# Altium PCB OpenMoteSTM-Border.PcbDoc (part 1 of 2)
Units mil, origin at the board's own origin, x right, y up, seen from the top; angles counter-clockwise.
Board outline 3923 x 2926 mil, 2 copper layers (Top Layer, Bottom Layer); 88 components, 131 nets, 421 pads, 102 vias.
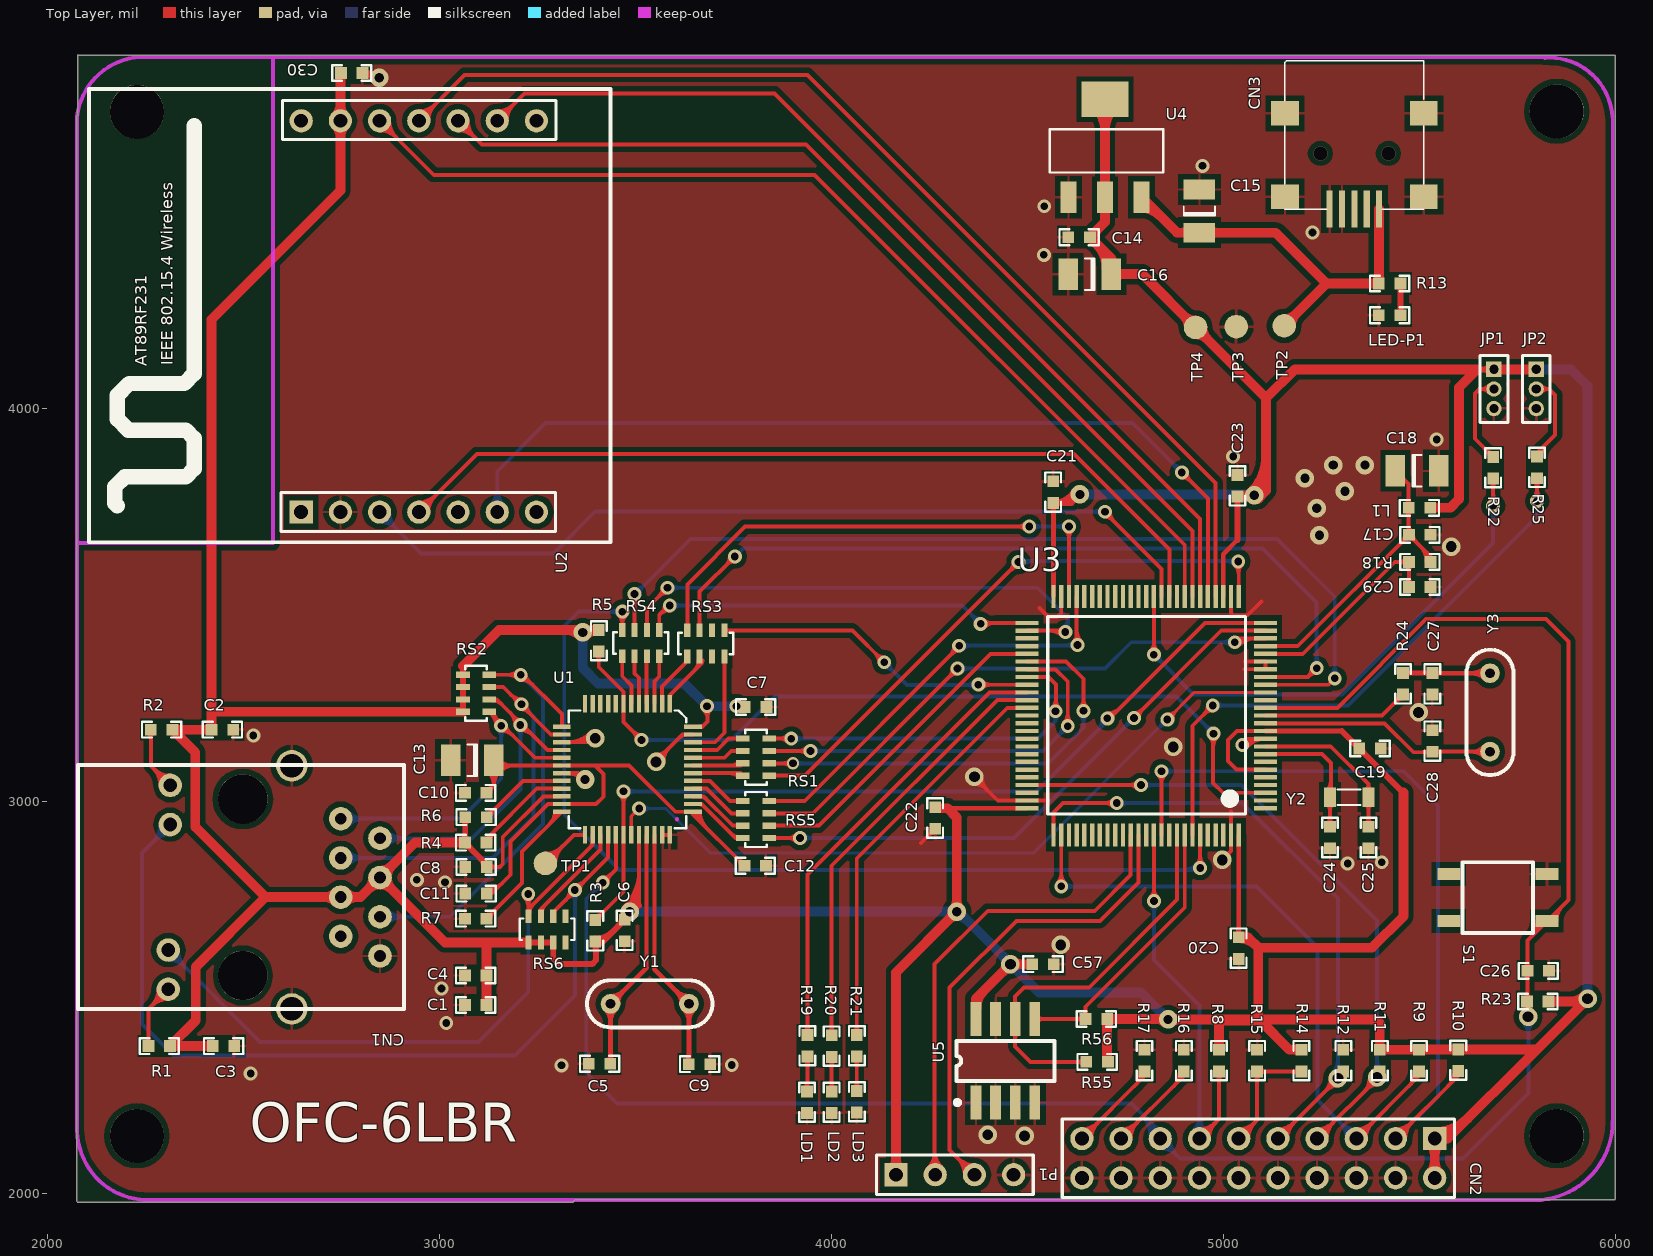
[diagram p0: Top Layer view]
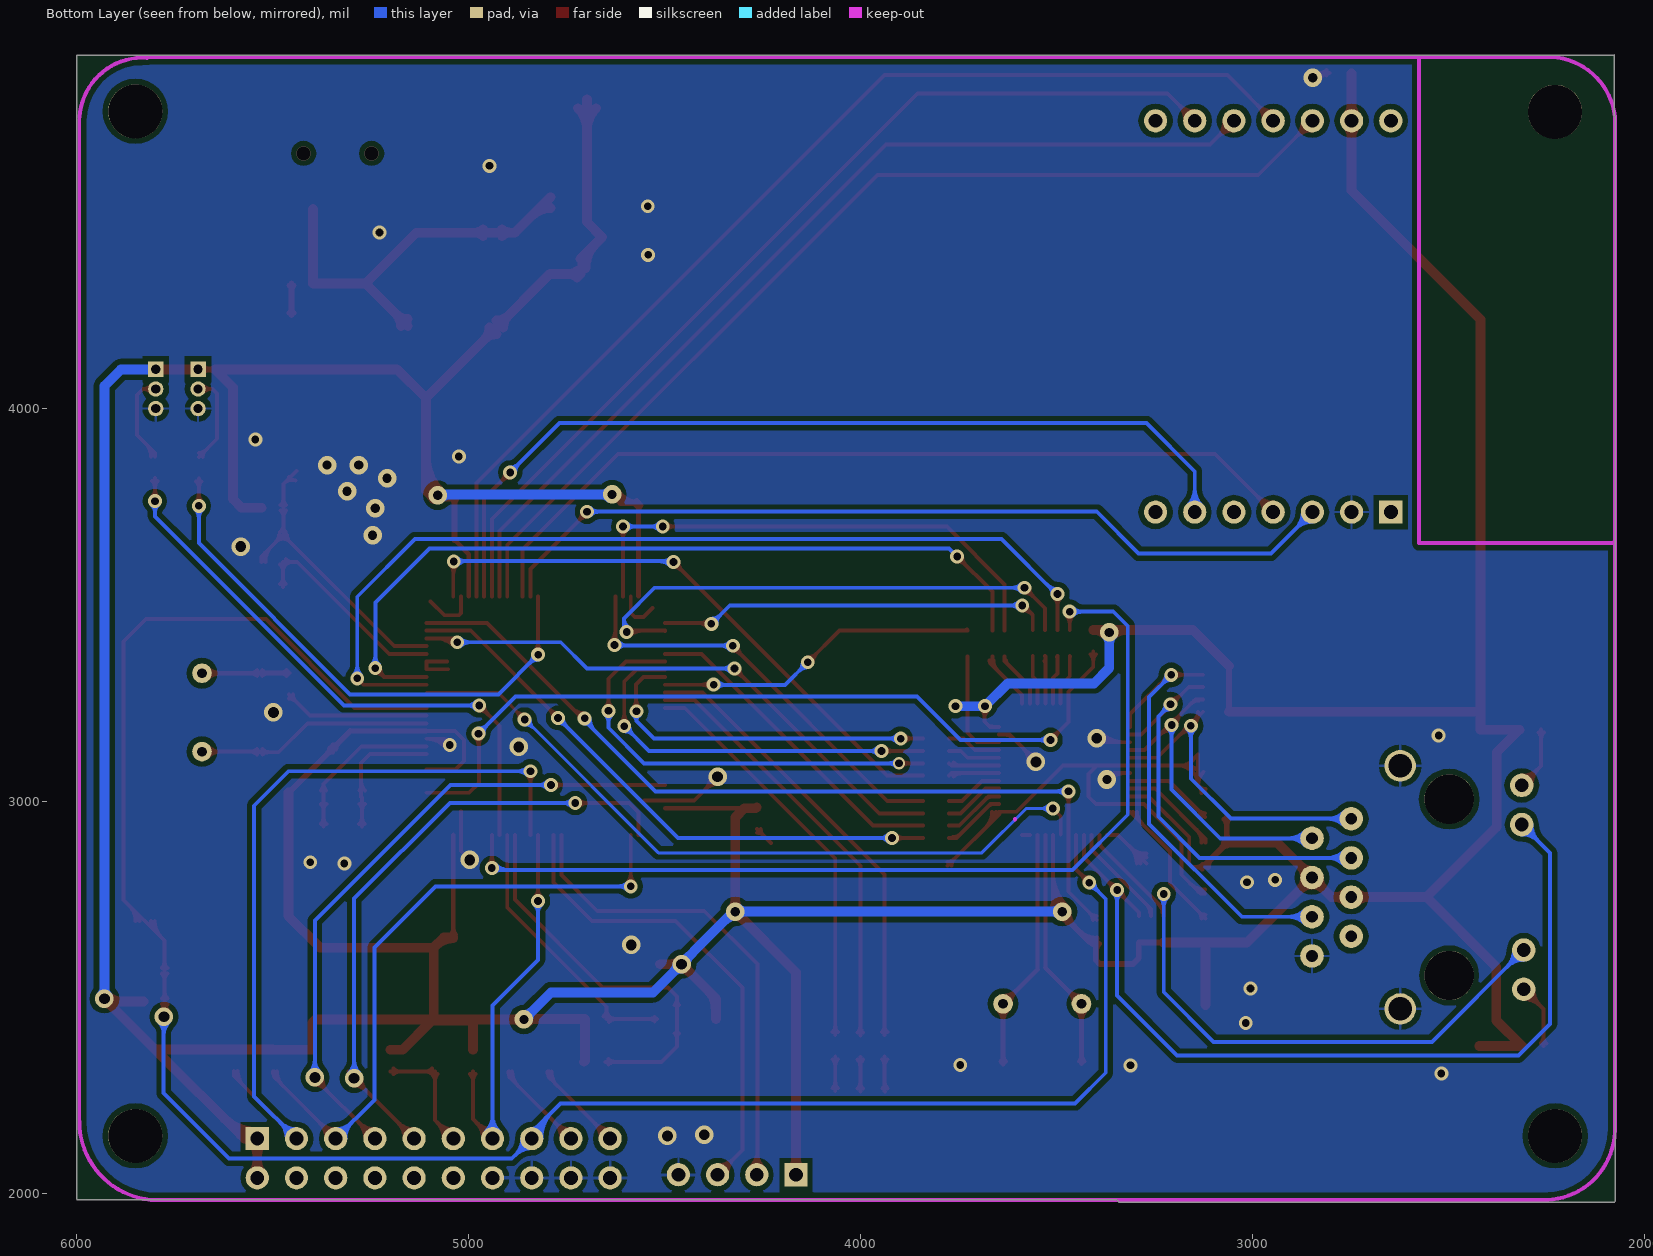
[diagram p1: Bottom Layer view, seen from below]

## Layer stack, top to bottom
Top Layer: signal copper 1.4
Dielectric: dielectric 12.6, FR-4, Dk 4.8
Bottom Layer: signal copper 1.4

## Board outline
2075,4746 2075,1979 2077,1977 3340,1977 3346,1983 5997,1983 5998,1984 5998,4902 2078,4902 2077,4903 2077,4748 2075,4746

## Design rules (kind name [scope] priority, off if disabled: settings)
Clearance 3V3 [InNamedPolygon ('3V3')] p1: gap=19.68
Clearance OtherPoly [InPolygon] p2: gap=13.78
Clearance [All] p3 off: gap=13.78
MinimumSolderMaskSliver [All] p1: minsoldermaskwidth=0
PlaneConnect [All] p1: planeconnectstyle=Relief reliefexpansion=20 reliefentries=4 reliefconductorwidth=5 reliefairgap=19.68
PolygonConnect GND [IsVia] p1: connectstyle=Direct reliefconductorwidth=10 reliefentries=4 polygonreliefangle="90 Angle"
PolygonConnect [All] p2: connectstyle=Relief reliefconductorwidth=7 reliefentries=4 polygonreliefangle="90 Angle"
RoutingVias [All] p1: holewidth=10 width=18 viastyle="Through Hole" minholewidth=2 minwidth=5 maxholewidth=28 maxwidth=50
SilkToSilkClearance [All] p1: silktosilkclearance=1
SilkscreenOverComponentPads [All] p1: minsilkscreentomaskgap=0
SolderMaskExpansion [All] p1: expansion=4
TestPointUsage [All] p1: valid=0 allowmultiple=FALSE
Testpoint [All] p1: side=15 testpointundercomponent=TRUE minsize=40 maxsize=100 preferedsize=60 minholesize=0 maxholesize=40 preferedholesize=32 testpointgrid=1 style=1021 order=0123456789
Width [All] p1: maxlimit=30 minlimit=5 preferedwidth=10
20 further rules are at their usual default settings.

## Classes and differential pairs
component class MCU: C17 C18 C19 C20 C21 C22 C23 C24 C25 C26 C27 C28 C29 C30 C57 JP1 JP2 L1 LD1 LD2 LD3 P1 P2 R18 R19 R20 R21 R22 R23 R24 R25 R55 R56 S1 U2 U3 U5 Y2 Y3
component class JTAG: C14 C15 C16 CN2 CN3 LED-P1 R8 R9 R10 R11 R12 R13 R14 R15 R16 R17 SB1 SB2 SB3 TP2 TP3 TP4 U4
component class DP83848CVV: C1 C2 C3 C4 C5 C6 C7 C8 C9 C10 C11 C12 C13 CN1 R1 R2 R3 R4 R5 R6 R7 RS1 RS2 RS3 RS4 RS5 RS6 TP1 U1 Y1

## Components (designator, comment, footprint, x,y, rotation, side; value= is the part's Value field where it differs from the comment)
C1 "Cap" 0603 3067,2480 r0 top
C2 "Cap" 0603 2471,3182 r180 top
C3 "Cap" 0603 2474,2375 r180 top
C4 "Cap" 0603 3067,2555 r0 top
C5 "Cap" 0603 3383,2330 r0 top
C6 "Cap" 0603 3472,2645 r90 top
C7 "Cap" 0603 3831,3240 r180 top
C8 "Cap" 0603 3068,2832 r0 top
C9 "Cap" 0603 3688,2329 r180 top
C10 "Cap" 0603 3067,3021 r0 top
C11 "Cap" 0603 3068,2764 r0 top
C12 "Cap" 0603 3830,2835 r180 top
C13 "Cap Pol1" 1210 3138,3106 r180 top
C14 "Cap" 0603 4606,4438 r0 top
C15 "Cap Pol1" 1210 4940,4450 r90 top
C16 "Cap Pol1" 1210 4713,4346 r180 top
C17 "Cap" 0603 5475,3679 r0 top
C18 "Cap Pol1" 1210 5438,3840 r0 top
C19 "Cap" 0603 5348,3134 r0 top
C20 "Cap" 0603 5038,2650 r270 top
C21 "Cap" 0603 4565,3763 r90 top
C22 "Cap" 0603 4264,2981.78 r270 top
C23 "Cap" 0603 5035,3779 r90 top
C24 "Cap" 0603 5271,2882 r90 top
C25 "Cap" 0603 5369,2932 r270 top
C26 "Cap" 0603 5827,2567 r180 top
C27 "Cap" 0603 5532,3324 r270 top
C28 "Cap" 0603 5532,3128 r90 top
C29 "Cap" 0603 5475,3546 r0 top
C30 "Cap" 0603 2801,4857 r180 top
C57 "Cap" 0603 4564,2584 r180 top
CN1 "J0011D21B" RJ45 2750,2955 r90 top
CN2 "JTAG" HDR2X10 5538,2139 r180 top
CN3 "USB" MINI-USB 5328,4658 r180 top
JP1 "MHDR1X3" MHDR1X3 5689,4101 r270 top
JP2 "MHDR1X3" MHDR1X3 5797,4101 r270 top
L1 "Res2" 0603 5524,3748 r180 top
LD1 "GREEN" 0603 3937,2257 r270 top
LD2 "ORANGE" 0603 4000,2257 r270 top
LD3 "RED" 0603 4064,2258 r270 top
LED-P1 "RED" 0603 5448,4239 r180 top
P1 "Header 4" HDR1X4 4164,2047 r0 top
R1 "Res2" 0603 2260,2375 r0 top
R2 "Res2" 0603 2266,3182 r0 top
R3 "Res2" 0603 3397,2644 r90 top
R4 "Res2" 0603 3117,2894 r180 top
R5 "Res2" 0603 3406,3434 r270 top
R6 "Res2" 0603 3118,2959 r180 top
R7 "Res2" 0603 3067,2700 r0 top
R8 "Res2" 0603 4988,2313 r90 top
R9 "Res2" 0603 5498,2313 r90 top
R10 "Res2" 0603 5598,2314 r90 top
R11 "Res2" 0603 5398,2313 r90 top
R12 "Res2" 0603 5305,2363 r270 top
R13 "Res2" 0603 5448,4320 r180 top
R14 "Res2" 0603 5198,2313 r90 top
R15 "Res2" 0603 5085,2363 r270 top
R16 "Res2" 0603 4898,2313 r90 top
R17 "Res2" 0603 4798,2313 r90 top
R18 "Res2" 0603 5525,3610 r180 top
R19 "Res2" 0603 3938,2401 r270 top
R20 "Res2" 0603 4000,2400 r270 top
R21 "Res2" 0603 4064,2401 r270 top
R22 "Res2" 0603 5687,3825 r90 top
R23 "Res2" 0603 5776,2489 r0 top
R24 "Res2" 0603 5457,3274 r90 top
R25 "Res2" 0603 5799,3876 r270 top
R55 "Res2" 0603 4702,2335 r180 top
R56 "Res2" 0603 4700,2444 r180 top
RS1 "51R" RES-4B 3777,3157 r0 top
RS2 "51R" RES-4B 3063,3320 r0 top
RS3 "51R" RES-4B 3724,3432 r270 top
RS4 "51R" RES-4B 3558,3433 r270 top
RS5 "51R" RES-4B 3777,2998 r0 top
RS6 "2K2" RES-4B 3319,2703 r270 top
S1 "SW-PB" KEY-SMD 5823,2698 r180 top
TP1 "25MHz" TP 3270,2841 r0 top
TP2 "5V" TP 5154,4212 r180 top
TP3 "GND" TP 5032,4210 r180 top
TP4 "3V3" TP 4928,4208 r180 top
U1 "DP83848CVV" DP83848CVV 3474,3086 r270 top
U2 "AT86RF231" AT86RF231 2891,4218 r90 top
U3 "STM32F107V" STM32F107 5017,3007 r180 top
U4 "LD1117S25TR" LD1117 4697,4790 r90 top
U5 "AT24C258" AT24C256C 4322,2231 r90 top
Y1 "25MHz" XTAL 3437,2483 r0 top
Y2 "32.768K" 32.768K 5272,3011 r0 top
Y3 "25MHz" XTAL 5679,3127 r90 top

## Footprints (in the part's own frame and the unit in brackets; to place one, negate y for a bottom-side part, rotate by r counter-clockwise, add the part's x,y. Pads: shape width x height; smd on the part's side, far side on the other; paste and mask are expansions set on the pad)
32.768K [mil]
  rect 30x50 smd: 1(-1.43,-1) 2(97,-1)
  silkscreen extent 18,-21 77,19
0603 [mil]
  rect 30x30 smd: 1(-2.5,0) 2(52.5,0)
  silkscreen extent -25,-20 75,20
1210 [mil]
  rect 50x80 smd: 1(-0.41,2.13) 2(109.83,2.13)
  silkscreen extent 43,-38 67,42
AT24C256C [mm]
  rect 2.2x0.7 smd: 1(0,-1.168) 2(0,-2.438) 3(0,-3.708) 4(0,-4.978) 5(5.4,-4.978) 6(5.4,-3.708) 7(5.4,-2.438) 8(5.4,-1.168)
  silkscreen extent -0.15,-6.25 4,0.18
AT86RF231 [mm]
  rect 1.5x1.5 hole 0.9: 1(-12.217,6.198)
  round 1.5 hole 0.9: 2(-12.217,3.658) 3(-12.217,1.118) 4(-12.217,-1.422) 5(-12.217,-3.962) 6(-12.217,-6.502) 7(-12.217,-9.042) 8(13.132,-9.042) 9(13.132,-6.502) 10(13.132,-3.962) 11(13.132,-1.422) 12(13.132,1.118) 13(13.132,3.658) 14(13.132,6.198)
  silkscreen extent -14.17,-13.84 15.19,19.94
DP83848CVV [mil] "TSQFP, 48-Leads, Body 10.2x10.2mm (max), Pitch 0.50mm, IPC Medium Density"
  rect 45x11 smd: 1(-162.32,113.27) 2(-162.32,93.58) 3(-162.32,73.9) 4(-162.32,54.21) 5(-162.32,34.53) 6(-162.32,14.84) 7(-162.32,-4.84) 8(-162.32,-24.53) 9(-162.32,-44.21) 10(-162.32,-63.9) 11(-162.32,-83.58) 12(-162.32,-103.27) 25(172.32,-103.27) 26(172.32,-83.58) 27(172.32,-63.9) 28(172.32,-44.21) 29(172.32,-24.53) 30(172.32,-4.84) 31(172.32,14.84) 32(172.32,34.53) 33(172.32,54.21) 34(172.32,73.9) 35(172.32,93.58) 36(172.32,113.27)
  rect 11x45 smd: 13(-103.27,-162.32) 14(-83.58,-162.32) 15(-63.9,-162.32) 16(-44.21,-162.32) 17(-24.53,-162.32) 18(-4.84,-162.32) 19(14.84,-162.32) 20(34.53,-162.32) 21(54.21,-162.32) 22(73.9,-162.32) 23(93.58,-162.32) 24(113.27,-162.32) 37(113.27,172.32) 38(93.58,172.32) 39(73.9,172.32) 40(54.21,172.32) 41(34.53,172.32) 42(14.84,172.32) 43(-4.84,172.32) 44(-24.53,172.32) 45(-44.21,172.32) 46(-63.9,172.32) 47(-83.58,172.32) 48(-103.27,172.32)
  silkscreen extent -145,-145 155,155
HDR1X4 [mm] "Connector; Header; 4 Position"
  rect 1.5x1.5 hole 0.9: 1(0,0)
  round 1.5 hole 0.9: 2(2.54,0) 3(5.08,0) 4(7.62,0)
  silkscreen extent -1.27,-1.27 8.89,1.27
HDR2X10 [mm] "Connector; Header; 10x2 Position"
  rect 1.5x1.5 hole 0.9: 1(0,0)
  round 1.5 hole 0.9: 2(0,2.54) 3(2.54,0) 4(2.54,2.54) 5(5.08,0) 6(5.08,2.54) 7(7.62,0) 8(7.62,2.54) 9(10.16,0) 10(10.16,2.54) 11(12.7,0) 12(12.7,2.54) 13(15.24,0) 14(15.24,2.54) 15(17.78,0) 16(17.78,2.54) 17(20.32,0) 18(20.32,2.54) 19(22.86,0) 20(22.86,2.54)
  silkscreen extent -1.27,-1.27 24.13,3.81
KEY-SMD [mil]
  rect 59.06x31.5 smd: 1(-1,4) 1(249,4) 2(-1,-116) 2(249,-116)
  silkscreen extent 34,-146 214,34
LD1117 [mil] "SOT223, 4-Leads, Body 6.7x8.3mm (max), Pitch 2.30mm, IPC Medium Density"
  rect 80x40 smd: 1(-250,93) 2(-250,0) 3(-250,-93)
  rect 90x120 smd: 2(0,0)
  silkscreen extent -187,-149 -77,141
MHDR1X3 [mm] "Connector; Header; 3 Position"
  rect 1x1 hole 0.6: 1(0,0)
  round 1 hole 0.6: 2(1.27,0) 3(2.54,0)
  silkscreen extent -0.9,-0.9 3.44,0.9
MINI-USB [mm]
  rect 0.4x2.4 smd: 1(-1.727,3.76) 2(-0.927,3.76) 3(-0.127,3.76) 4(0.673,3.76) 5(1.473,3.76)
  rect 1.8x1.6 smd: 6(4.373,2.96) 7(4.373,-2.44) 8(-4.627,-2.44) 9(-4.627,2.96)
  silkscreen extent -4.63,-5.84 4.37,3.76
RES-4B [mil]
  rect 35x15.75 smd: 1(-3.5,2.24) 2(63.5,2.24) 3(-3.5,-29.25) 4(63.5,-29.25) 5(-3.5,-60.75) 6(63.5,-60.75) 7(-3.5,-92.24) 8(63.5,-92.24)
  silkscreen extent 2,-115 58,25
RJ45 [mil]
  round 126 hole 126 unplated: 0(-400,252) 0(50,252)
  round 60 hole 30: 1(0,2) 2(-50,-98) 3(-100,2) 4(-150,-98) 5(-200,2) 6(-250,-98) 7(-300,2) 8(-350,-98)
  round 60 hole 35: 9(85,437) 10(-15,437) 11(-335,442) 12(-435,442)
  round 80 hole 60: 13(-485,127) 14(135,127)
  silkscreen extent -485,-159 137,672
STM32F107 [mil] "TSQFP, 100-Leads, Body 17.0x17.0mm (max), Pitch 0.50mm, IPC Medium Density"
  rect 59.06x11 smd: 1(-89.13,25.22) 2(-89.13,5.54) 3(-89.13,-14.15) 4(-89.13,-33.83) 5(-89.13,-53.52) 6(-89.13,-73.2) 7(-89.13,-92.89) 8(-89.13,-112.57) 9(-89.13,-132.26) 10(-89.13,-151.94) 11(-89.13,-171.63) 12(-89.13,-191.31) 13(-89.13,-211) 14(-89.13,-230.68) 15(-89.13,-250.37) 16(-89.13,-270.06) 17(-89.13,-289.74) 18(-89.13,-309.43) 19(-89.13,-329.11) 20(-89.13,-348.8) 21(-89.13,-368.48) 22(-89.13,-388.17) 23(-89.13,-407.85) 24(-89.13,-427.54) 25(-89.13,-447.22) 51(519.13,-447.22) 52(519.13,-427.54) 53(519.13,-407.85) 54(519.13,-388.17) 55(519.13,-368.48) 56(519.13,-348.8) 57(519.13,-329.11) 58(519.13,-309.43) 59(519.13,-289.74) 60(519.13,-270.06) 61(519.13,-250.37) 62(519.13,-230.68) 63(519.13,-211) 64(519.13,-191.31) 65(519.13,-171.63) 66(519.13,-151.94) 67(519.13,-132.26) 68(519.13,-112.57) 69(519.13,-92.89) 70(519.13,-73.2) 71(519.13,-53.52) 72(519.13,-33.83) 73(519.13,-14.15) 74(519.13,5.54) 75(519.13,25.22)
  rect 11x59.06 smd: 26(-21.22,-515.13) 27(-1.54,-515.13) 28(18.15,-515.13) 29(37.83,-515.13) 30(57.52,-515.13) 31(77.2,-515.13) 32(96.89,-515.13) 33(116.57,-515.13) 34(136.26,-515.13) 35(155.94,-515.13) 36(175.63,-515.13) 37(195.31,-515.13) 38(215,-515.13) 39(234.69,-515.13) 40(254.37,-515.13) 41(274.06,-515.13) 42(293.74,-515.13) 43(313.43,-515.13) 44(333.11,-515.13) 45(352.8,-515.13) 46(372.48,-515.13) 47(392.17,-515.13) 48(411.85,-515.13) 49(431.54,-515.13) 50(451.22,-515.13) 76(451.22,93.13) 77(431.54,93.13) 78(411.85,93.13) 79(392.17,93.13) 80(372.48,93.13) 81(352.8,93.13) 82(333.11,93.13) 83(313.43,93.13) 84(293.74,93.13) 85(274.06,93.13) 86(254.37,93.13) 87(234.69,93.13) 88(215,93.13) 89(195.31,93.13) 90(175.63,93.13) 91(155.94,93.13) 92(136.26,93.13) 93(116.57,93.13) 94(96.89,93.13) 95(77.2,93.13) 96(57.52,93.13) 97(37.83,93.13) 98(18.15,93.13) 99(-1.54,93.13) 100(-21.22,93.13)
  silkscreen extent -38,-464 466,40
TP [mil]
  round 60 smd: 1(0,0)
XTAL [mil]
  round 50 hole 25: 1(-1,0) 2(199,0)
  silkscreen extent -61,-60 259,60

## Part data
C1 C2 C3 C4 C5 C6 C7 C8 C9 C10 C11 C12 C14 C17 C19 C20 C21 C22 C23 C24 C25 C26 C27 C28 C29 C30 C57: "Capacitor"
C13 C15 C16 C18: "Polarized Capacitor (Radial)"
CN2: library part "Header 10X2", "Header, 10-Pin, Dual row"
CN3: library part MINIUSB_A
JP1 JP2: "Header, 3-Pin"
L1 R1 R2 R3 R4 R5 R6 R7 R8 R9 R10 R11 R12 R13 R14 R15 R16 R17 R18 R19 R20 R21 R22 R23 R24 R25 R55 R56: "Resistor"
LD1 LD2 LD3 LED-P1: library part LED2, "Typical RED, GREEN, YELLOW, AMBER GaAs LED"
P1: "Header, 4-Pin"
RS1 RS2 RS3 RS4 RS5 RS6: library part "Resister Array"
S1: "Switch"
TP1 TP2 TP3 TP4: library part TP
U4: library part LD1117
Y1 Y2 Y3: library part XTAL, "Crystal Oscillator"

## Free pads (board coordinates)
  round 137.8 hole 137.8 unplated: 0(2228,2146) 0(2228,4758) 0(5849,2146) 0(5849,4759)

## Via types
v1: diameter 35.43, hole 19.68, Top Layer to Bottom Layer, 70 vias
v2: diameter 47.24, hole 27.56, Top Layer to Bottom Layer, 15 vias
v3: diameter 47.24, hole 23.62, Top Layer to Bottom Layer, 14 vias
v4: diameter 35.43, hole 35.43, Top Layer to Bottom Layer, 2 vias
v5: diameter 31.5, hole 19.68, Top Layer to Bottom Layer, 1 vias

## Nets (pads, with @x,y where several pads share a name; then routed paths per layer and width w, separated by ;. In a path a pad name is that pad's centre, name@x,y a point inside that pad or via, vN(x,y) a via of type N, cw(c..) or ccw(c..) an arc to the next point about the centre after c; other vN are vias at no path point)
3V3: C1.2 C2.2 C3.2 C4.2 C6.2 C7.2 C8.2 C14.2 C16.1 C19.1 C20.1 C21.1 C22.1 C23.1 C30.2 C57.2 CN1.4 CN1.5 CN2.1 CN2.2 JP1.1 JP2.1 L1.1 P1.1 R1.2 R2.2 R3.1 R4.2 R5.1 R6.2 R8.2 R9.2 R10.2 R11.2 R14.2 R23.2 R55.1 R56.1 RS2.1 RS2.3 RS2.5 RS2.7 RS6.4 RS6.6 RS6.8 TP4.1 U1.22 U1.32 U1.48 U2.13 U3.6 U3.11 U3.28 U3.50 U3.75 U3.100 U4.2 U5.8 | length 22802.7
  Top Layer w10: C8.2@3120.5,2832 3154,2832 3161,2839 3161,2908 3265.1,3012.1 U1.22@3311.68,3012.1 U1.22@3292.1,3012.1 ; C8.2@3127.57,2824.93 cw(c3144.64,2807.86) 3144.64,2832 cw(c3144.64,2856.14) C8.2@3127.57,2839.07 ; v3@3471.83,2731.17 ccw(c3383.24,2819.76) 3508.53,2819.76 ; v3@3478.9,2724.1 ccw(c3407.38,2795.62) 3508.53,2795.62 ; v3@3485.97,2717.03 ccw(c3431.53,2771.47) 3508.53,2771.47 ; v3@3493.05,2709.95 ccw(c3455.67,2747.33) 3508.53,2747.33 ; 3508.53,2734.03 U1.32@3508.53,2913.68 ; U1.48@3646.32,3189.27 3669.27,3189.27 3683,3203 3683,3241 v1(3682,3242) ; U1.48@3663.32,3189.77 ccw(c3663.32,3205.33) 3674.32,3194.32 ; v1@3673.01,3233.01 cw(c3648.89,3208.89) 3683,3208.89 ; 3683,3213.71 cw(c3710.29,3213.71) v1@3690.99,3233.01 ; U3.6@5106.13,3080.2 5032.8,3080.2 5011,3102 5011,3156 5033.63,3178.63 U3.11@5106.13,3178.63
  Top Layer w12: 4295,2981.78 U3.75@4497.87,2981.78 ; C21.1@4558.64,3754.14 cw(c4541.39,3736.89) 4565.78,3736.89 ; U3.50@4565.78,3522.13 C21.1@4565.78,3759.72 ; 4565.78,3740.65 cw(c4584.85,3740.65) C21.1@4571.36,3754.14 ; U3.28@4998.85,3522.13 4998.85,3629.85 5035,3666 ; C20.1@5031.64,2658.86 ccw(c5016.27,2674.23) 5038,2674.23 ccw(c5059.73,2674.23) C20.1@5044.36,2658.86 ; C20.1@5038,2652.5 U3.100@5038,2913.65 ; U3.11@5106.13,3178.63 5300.87,3178.63
  Top Layer w15: 2418.5,3218.5 2427.76,3227.76 ; C30.2@2747,4855.5 C30.2@2748.5,4857 ; R4.2@3059.2,2899.3 ccw(c3043.98,2914.52) 3065.5,2914.52 ; RS2.7@3059.5,3227.76 RS2.5@3059.5,3259.25 RS2.3@3059.5,3290.75 RS2.1@3059.5,3322.24 3059.5,3344.5 ; R6.2@3060.2,2953.7 cw(c3047.39,2940.89) 3065.5,2940.89 cw(c3083.61,2940.89) R6.2@3070.8,2953.7 ; R4.2@3064.5,2886.5 cw(c3064.5,2868.39) 3077.3,2881.2 cw(c3090.11,2894) R4.2@3072,2894 ; 3065.5,2909.69 ccw(c3080.19,2909.69) R4.2@3069.8,2899.3 ; R6.2@3065.5,2959 3065.5,2895 R4.2@3064.5,2894 C8.2@3120.5,2838 ; 3103.45,2855.05 cw(c3080.41,2832) C8.2@3113,2832 ; RS6.8@3226.76,2639.5 RS6.6@3258.25,2639.5 RS6.4@3289.75,2639.5 3289.75,2599.25 3305,2584 3389,2584 3399,2594 R3.1@3399,2639.5 ; R3.1@3391.7,2636.2 cw(c3374.07,2618.57) 3399,2618.57 ; R3.1@3397,2634 ccw(c3397,2661.76) 3416.63,2642.13 ; R3.1@3397,2641.5 3416,2641.5 C6.2@3472,2697.5 ; R3.1@3397,2649 ccw(c3397,2712.98) 3442.24,2667.74 ; R3.1@3402.3,2636.2 cw(c3415.11,2623.39) 3415.11,2641.5 cw(c3415.11,2659.61) R3.1@3402.3,2646.8 ; 3452.17,2677.67 ccw(c3411.85,2718) v3@3468.88,2718 ; C6.2@3464.5,2697.5 cw(c3446.39,2697.5) 3459.2,2684.7 cw(c3472,2671.89) C6.2@3472,2690 ; C6.2@3470.28,2695.78 cw(c3485,2681.06) C6.2@3485,2701.88 ; v3@3488.75,2714.25 3508.53,2734.03 ; C21.1@4565.78,3759.72 C21.1@4565,3760.5 ; C21.1@4570.3,3755.2 cw(c4583.11,3742.39) 4583.11,3760.5 cw(c4583.11,3778.61) C21.1@4570.3,3765.8 ; 4592.11,3760.5 ccw(c4592.11,3807.64) v3@4632.05,3782.6 ; v3@4619.34,3790.56 cw(c4565,3824.64) C21.1@4565,3760.5 ; v3(4633,3782) 4611.5,3760.5 C21.1@4565,3760.5 ; C16.1@4713.41,4343.87 C16.1@4713.41,4383.09 ; C23.1@5029.7,3771.2 cw(c5016.89,3758.39) 5035,3758.39 cw(c5053.11,3758.39) C23.1@5040.3,3771.2 ; 5035,3666 C23.1@5035,3776.5 ; 5300.87,3178.63 C19.1@5345.5,3134 5458,3021.5 ; C19.1@5338,3134 ccw(c5319.89,3134) 5332.7,3146.8 ccw(c5345.5,3159.61) C19.1@5345.5,3141.5 ; C19.1@5345.5,3126.5 cw(c5345.5,3108.39) 5358.3,3121.2 cw(c5371.11,3134) C19.1@5353,3134 ; R9.2@5498,2365.5 R9.2@5499,2366.5 ; 5646,4101 JP1.1@5689,4101 ; JP1.1@5680.38,4092.38 ccw(c5659.58,4071.58) 5659.58,4101 ccw(c5659.58,4130.42) JP1.1@5680.38,4109.62 ; C6.2@3484.8,2710.3 ccw(c3497.61,2697.5) 3479.5,2697.5 cw(c3497.61,2697.5) C6.2@3484.8,2710.3 ; C6.2@3484.8,2710.3 cw(c3472,2723.11) 3472,2705 ccw(c3472,2723.11) C6.2@3484.8,2710.3
  Top Layer w25: C3.2@2421.5,2375 R1.2@2312.5,2375 2378,2440.5 2378,2577 2556,2755 ; 2427.76,3227.76 RS2.7@3059.5,3227.76 ; U2.13@2734.96,4722.96 cw(c2705.89,4693.89) 2747,4693.89 cw(c2788.11,4693.89) U2.13@2759.04,4722.96 ; U2.13@2734.96,4747.04 ccw(c2705.89,4776.11) 2747,4776.11 ccw(c2788.11,4776.11) U2.13@2759.04,4747.04 ; CN1.5@2735.63,2742.63 ccw(c2705.75,2712.75) 2705.75,2755 ccw(c2705.75,2797.25) CN1.5@2735.63,2767.37 ; C30.2@2747,4855.5 2747,4557 2418.5,4228.5 2418.5,3218.5 C2.2@2418.5,3182 R2.2@2318.5,3182 2377,3123.5 2377,2934 2556,2755 ; CN1.5@2760.37,2742.63 cw(c2790.25,2712.75) 2790.25,2755 cw(c2790.25,2797.25) CN1.5@2760.37,2767.37 ; CN1.4@2830.5,2805 cw(c2788.25,2805) 2818.13,2775.13 cw(c2848,2745.25) 2848,2787.5 cw(c2848,2745.25) 2877.87,2775.13 cw(c2907.75,2805) 2865.5,2805 cw(c2907.75,2805) 2877.87,2834.87 cw(c2848,2864.75) CN1.4@2848,2822.5 ; 3059.5,3344.5 3151.5,3436.5 R5.1@3406,3436.5 ccw(c3406,3391.12) v3@3373.07,3422.35 ; R4.2@3064.5,2894 2937,2894 CN1.4@2848,2805 ; C1.2@3119.5,2480 C4.2@3119.5,2555 3119.5,2639 3120,2639.5 ; RS6.8@3226.76,2639.5 3120,2639.5 ; 3322.46,3436.5 cw(c3322.46,3387.46) v3@3357.14,3422.14 ; P1.1@4151.96,2059.04 ccw(c4122.89,2088.11) 4164,2088.11 ccw(c4205.11,2088.11) P1.1@4176.04,2059.04 ; P1.1@4164,2047 4164,2563 v3(4319,2718) 4319,2957.78 4295,2981.78 4266.5,2981.78 C22.1@4264,2984.28 ; v3@4307.88,2718 cw(c4281.03,2718) 4300.01,2699.01 cw(c4319,2680.03) v3@4319,2706.88 ; v3@4311.14,2725.86 ccw(c4292.15,2744.85) 4319,2744.85 ccw(c4345.85,2744.85) v3@4326.86,2725.86 ; U5.8@4368,2443.6 4368,2496 v2(4456,2584) C57.2@4511.5,2584 ; U5.8@4369.28,2473.13 cw(c4427.59,2473.13) 4386.36,2514.36 ; v2@4444.88,2584 cw(c4418.03,2584) 4437.01,2565.01 cw(c4456,2546.03) v2@4456,2572.88 ; v2@4463.86,2576.14 cw(c4482.85,2557.15) 4482.85,2584 cw(c4482.85,2610.85) v2@4463.86,2591.86 ; U4.2@4674.02,4767.02 cw(c4618.54,4711.54) 4697,4711.54 cw(c4775.46,4711.54) U4.2@4719.98,4767.02 ; 4674.94,4421.56 cw(c4612.25,4358.87) C16.1@4700.91,4358.87 ; U4.2@4697,4790 U4.2@4697,4540 4697,4476.5 C14.2@4658.5,4438 C16.1@4713.41,4383.09 ; R55.1@4704.5,2335 4702.5,2337 R56.1@4702.5,2444 v3@4857,2444 ; C16.1@4713.41,4343.87 4792.13,4343.87 TP4.1@4928,4208 5108,4028 ; C16.1@4722.24,4335.04 cw(c4743.58,4313.7) 4743.58,4343.87 cw(c4743.58,4374.05) C16.1@4722.24,4352.71 ; 4828.73,2444 cw(c4828.73,2413.73) v3@4850.14,2435.14 ; 4833.56,2444 ccw(c4833.56,2467.44) v3@4850.14,2450.86 ; v3(4858,2443) 5088,2443 ; v3@4865.86,2435.14 cw(c4884.85,2416.15) 4884.85,2443 cw(c4884.85,2469.85) v3@4865.86,2450.86 ; TP4.1@4910.5,4208 ccw(c4868.25,4208) 4898.13,4237.87 ccw(c4928,4267.75) TP4.1@4928,4225.5 ; TP4.1@4928,4190.5 cw(c4928,4148.25) 4957.87,4178.13 cw(c4987.75,4208) TP4.1@4945.5,4208 ; R8.2@4988,2365.5 4988,2435 4993,2440 5093,2440 5167.5,2365.5 R14.2@5198,2365.5 ; C23.1@5035,3776.5 5092.5,3776.5 5108,3792 ; C20.1@5038,2650 cw(c5038,2587.23) 5082.38,2631.62 ; C20.1@5038,2652.5 5061.5,2652.5 5088,2626 ; C20.1@5038.64,2650.08 cw(c5047.83,2615.33) 5073.25,2640.75 ; C23.1@5042.7,3776.5 ccw(c5042.7,3815.3) 5070.14,3787.86 ccw(c4978.72,3879.28) 5108,3879.28 ; v3@5083.98,3789.38 ccw(c5094.36,3805.64) 5108,3792 ; v3@5087.81,3770.19 ccw(c5039.08,3818.92) 5108,3818.92 ; 5458,3021.5 5458,2706 5378,2626 5088,2626 ; R9.2@5498,2365.5 R11.2@5398,2365.5 5398,2434 5389,2443 5088,2443 ; R9.2@5499,2366.5 R10.2@5598,2366.5 5798.5,2366.5 ; CN2.2@5525.96,2051.04 ccw(c5496.89,2080.11) 5538,2080.11 ccw(c5579.11,2080.11) CN2.2@5550.04,2051.04 ; CN2.1@5525.96,2126.96 cw(c5496.89,2097.89) 5538,2097.89 cw(c5579.11,2097.89) CN2.1@5550.04,2126.96 ; L1.1@5526.5,3748 5578,3748 5600,3770 5600,4055 5646,4101 5181,4101 5108,4028 ; CN2.2@5538,2039 CN2.1@5538,2139 5571,2139 5798.5,2366.5 ; CN2.1@5538,2131.03 ccw(c5538,2191.45) 5580.72,2148.72 ; CN2.1@5538,2156.03 ccw(c5538,2276.8) 5623.4,2191.4 ; JP1.1@5689,4101 JP2.1@5797,4101 ; R23.2@5828.5,2489 v2@5921,2489 ; 5884.25,2489 ccw(c5884.25,2539.75) v2@5920.14,2503.86 ; v2@5916.88,2496 cw(c5890.03,2496) 5909.01,2477.01 cw(c5928,2458.03) v2@5928,2484.88 ; v2(5928,2496) v2@5921,2489 ; 2556,2755 CN1.5@2748,2755 2798,2755 CN1.4@2848,2805 ; CN1.4@2848,2805 3013.5,2639.5 3120,2639.5 ; 5088,2443 5088,2626 ; 5108,3792 5108,4028 ; 5798.5,2366.5 v2@5921,2489
  Bottom Layer w25: v3@3357.14,3422.14 cw(c3338.15,3403.15) 3365,3403.15 cw(c3391.85,3403.15) v3@3372.86,3422.14 ; v3(3365,3430) 3365,3339 3404,3300 3624,3300 v1(3682,3242) v1(3757,3242) ; v3(3485,2718) v3(4319,2718) ; v3@3492.86,2710.14 cw(c3511.85,2691.15) 3511.85,2718 cw(c3511.85,2744.85) v3@3492.86,2725.86 ; v3@4311.14,2710.14 ccw(c4292.15,2691.15) 4292.15,2718 ccw(c4292.15,2744.85) v3@4311.14,2725.86 ; v3@4319,2706.88 cw(c4319,2670.37) 4344.81,2696.19 ; v3@4323,2718 4529,2512 4789,2512 v3(4858,2443) ; 4436.31,2604.69 cw(c4415.61,2584) v2@4444.88,2584 ; 4438.72,2602.28 ccw(c4456,2619.56) v2@4456,2595.12 ; v2@4456,2572.88 cw(c4456,2543.61) 4476.69,2564.31 ; v2@4467.12,2584 ccw(c4491.56,2584) 4474.28,2566.72 ; v3(4633,3782) v3@5069,3782 ; v3@4640.86,3774.14 cw(c4659.85,3755.15) 4659.85,3782 cw(c4659.85,3808.85) v3@4640.86,3789.86 ; v3@4846.88,2443 ccw(c4820.03,2443) 4839.01,2461.99 ccw(c4858,2480.97) v3@4858,2454.12 ; 5046.32,3782 cw(c5046.32,3748.32) v3@5070.14,3772.14 ; JP2.1@5797,4101 5886,4101 5928,4059 v2(5928,2496) ; v2@5920.14,2503.86 ccw(c5901.15,2522.85) 5928,2522.85 ccw(c5954.85,2522.85) v2@5935.86,2503.86
  other v3: 5078,3780
5V: C15.1 CN3.1 R13.2 TP2.1 U4.3 | length 1252.8
  Top Layer w15: R13.2@5395.5,4320 R13.2@5395.99,4320.49
  Top Layer w25: U4.3@4790,4512.5 cw(c4790,4446.11) 4836.95,4493.05 ; U4.3@4790,4540 4880.41,4449.59 C15.1@4937.87,4449.59 5132.41,4449.59 5262,4320 ; C15.1@4914.04,4440.76 ccw(c4892.7,4419.42) 4892.7,4449.59 ccw(c4892.7,4479.77) C15.1@4914.04,4458.43 ; C15.1@4961.71,4440.76 cw(c4983.05,4419.42) 4983.05,4449.59 cw(c4983.05,4479.77) C15.1@4961.71,4458.43 ; TP2.1@5154,4212 5262,4320 ; TP2.1@5154,4229.5 ccw(c5154,4271.75) 5183.87,4241.87 ccw(c5213.75,4212) TP2.1@5171.5,4212 ; R13.2@5395.5,4320 5262,4320 ; R13.2@5395.99,4320.49 CN3.1@5395.99,4509.95
GND: C1.1 C2.1 C3.1 C4.1 C5.1 C6.1 C7.1 C8.1 C9.1 C10.1 C11.1 C12.1 C13.2 C14.1 C15.2 C16.2 C17.2 C18.2 C19.2 C20.2 C21.2 C22.2 C23.2 C24.1 C25.2 C26.1 C27.2 C28.2 C29.2 C30.1 C57.1 CN1.8 CN1.13 CN1.14 CN2.4 CN2.6 CN2.8 CN2.10 CN2.12 CN2.14 CN2.16 CN2.18 CN2.20 CN3.4 CN3.5 CN3.6 CN3.7 CN3.8 CN3.9 JP1.3 JP2.3 LD1.2 LD2.2 LD3.2 LED-P1.2 P1.4 R7.1 R12.1 R15.1 R16.2 R17.2 S1.2@5824,2814 TP3.1 U1.15 U1.19 U1.35 U1.36 U1.47 U2.2 U3.10 U3.19 U3.20 U3.27 U3.49 U3.74 U3.99 U4.1 U5.1 U5.2 U5.3 U5.4 U5.7 | length 1804.5
  Top Layer w10: C30.1@2810.57,4849.93 cw(c2827.64,4832.86) 2827.64,4857 cw(c2827.64,4881.14) C30.1@2810.57,4864.07 ; C30.1@2817.38,4857 cw(c2817.38,4835.45) v3@2837.82,4842.27 ; v3@2828.34,4839.11 ccw(c2803.5,4830.82) C30.1@2803.5,4857 2834,4857 v3(2846,4845) ; U1.19@3311.68,3071.16 3352.84,3071.16 v3@3370,3054 ; U1.15@3311.68,3149.9 3386.9,3149.9 v2(3397,3160) ; U1.15@3327.65,3149.9 ccw(c3327.65,3229.35) v2@3383.83,3173.17 ; U1.19@3328.74,3071.16 cw(c3328.74,3031.35) v3@3363.48,3050.79 ; 3345.79,3071.16 cw(c3345.79,3040.89) v3@3372.2,3055.67 ; 3351.8,3149.9 ccw(c3351.8,3205.2) v2@3390.9,3166.1 ; v2@3552,3118.62 ccw(c3552,3158.75) 3580.38,3130.38 ; v2@3560.62,3100 cw(c3586.27,3100) 3568.13,3118.13 ; v2@3562,3107 3562,3112 3619.58,3169.58 U1.47@3646.32,3169.58 ; U1.35@3567.58,2913.68 U1.36@3587.27,2913.68 ; v2@3570.62,3100 cw(c3620.41,3100) 3585.2,3135.2 ; 3611.84,3161.84 cw(c3629.32,3144.36) U1.47@3629.32,3169.08 ; 3614.71,3164.71 cw(c3626.05,3153.37) U1.47@3629.22,3169.09 ; 4227.72,2893 C22.2@4264,2929.28 ; C22.2@4254,2929.28 cw(c4229.86,2929.28) 4246.93,2912.21 cw(c4264,2895.14) C22.2@4264,2919.28 ; v2@4364,3043.38 cw(c4364,3000.83) 4394.08,3030.92 ; v2@4369,3056 4423.54,3001.46 U3.74@4497.87,3001.46 4550.54,3001.46 4551,3001 ; v2@4382.62,3062 ccw(c4429.99,3062) 4396.5,3028.5 ; 4530,3492 4553,3469 4575.23,3469 4585.46,3479.23 U3.49@4585.46,3522.13 ; v2(4996,2850) 5018.54,2872.54 U3.99@5018.54,2913.87 5018.54,2974 ; U3.27@5018.54,3522.13 5018.54,3479.23 5023.77,3474 5061,3474 5096,3509 ; v1@5041.28,3147.51 cw(c5064.87,3128.9) 5064.87,3158.94 ; v1(5047,3143) 5062.94,3158.94 U3.10@5106.13,3158.94 ccw(c5106.13,3096.33) v1@5056.98,3135.12 ; v1@5049.13,3141.32 cw(c5085.5,3112.62) U3.10@5085.5,3158.94 ; 5050.89,3336.11 U3.19@5106.13,3336.11 U3.20@5106.13,3355.8 5053.8,3355.8
  other v1: 2518,2305 3311,2326 3745,2327 3017,2434 3005,2522 3014,2793 2942,2799 5316,2841 5403,2844 2525,3167 5024,3879 5543,3922 4541,4393 5226,4450 4542,4517 4946,4620
  other v2: 4492,2146 4398,2149 4584,2633 4364,3062 3552,3100 4871,3138 5497,3226 5580,3649
  other v3: 3371,3055 5244,3678 5237,3747 5309,3790 5207,3823 5279,3857 5360,3857
I2C1_SCL: R55.2 U3.92 U5.6 | length 1110.2
  Top Layer w10: U5.6@4461.79,2407.86 cw(c4446.8,2392.87) 4468,2392.87 cw(c4489.2,2392.87) U5.6@4474.21,2407.86 ; U5.6@4461.79,2479.33 ccw(c4446.8,2494.32) 4468,2494.32 ccw(c4489.2,2494.32) U5.6@4474.21,2479.33 ; R55.2@4642.43,2327.93 ccw(c4625.36,2310.86) 4625.36,2335 ccw(c4625.36,2359.14) R55.2@4642.43,2342.07 ; R55.2@4649.5,2335 4507,2335 4468,2374 U5.6@4468,2443.6 4468,2502 4491,2525 4656.86,2525 4880.74,2748.88 U3.92@4880.74,2913.87
I2C1_SDA: R56.2 U3.93 U5.5 | length 813.4
  Top Layer w10: U5.5@4518,2443.6 4518.4,2444 R56.2@4647.5,2444 4647.5,2475.5 4900.43,2728.43 U3.93@4900.43,2913.87 ; U5.5@4524.21,2437.39 cw(c4540.17,2421.43) 4540.17,2444 ; U5.5@4524.21,2449.81 ccw(c4538.23,2463.82) 4538.23,2444 ; R56.2@4640.43,2436.93 ccw(c4623.36,2419.86) 4623.36,2444 ccw(c4623.36,2468.14) 4640.43,2451.07 ccw(c4623.36,2468.14) 4647.5,2468.14 ccw(c4671.64,2468.14) R56.2@4654.57,2451.07
LED1: R19.1 U3.60 | length 1199.5
  Top Layer w10: R19.1@3930.93,2410.57 ccw(c3913.86,2427.64) 3938,2427.64 ccw(c3962.14,2427.64) R19.1@3945.07,2410.57 ; R19.1@3938,2403.5 3938,2813 4402.06,3277.06 U3.60@4497.87,3277.06
LED2: R20.1 U3.61 | length 1143.2
  Top Layer w10: R20.1@3992.93,2409.57 ccw(c3975.86,2426.64) 4000,2426.64 ccw(c4024.14,2426.64) R20.1@4007.07,2409.57 ; R20.1@4000,2402.5 4000,2835 4422.37,3257.37 U3.61@4497.87,3257.37
LED3: R21.1 U3.62 | length 1081.2
  Top Layer w10: R21.1@4056.93,2410.57 ccw(c4039.86,2427.64) 4064,2427.64 ccw(c4088.14,2427.64) R21.1@4071.07,2410.57 ; R21.1@4064,2403.5 4064,2854 4447.68,3237.68 U3.62@4497.87,3237.68
MII_COL: RS1.8 U3.26 | length 1705.9
  Top Layer w10: RS1.8@3840.5,3064.76 3931.76,3064.76 v1(4476.44,3609.44) ; v1@4463.72,3609.44 cw(c4433.02,3609.44) 4454.73,3587.73 cw(c4476.44,3566.02) v1@4476.44,3596.72 ; v1@5028.01,3602.01 cw(c5003.35,3577.35) 5038.22,3577.35 ; v1(5037,3611) 5038.22,3609.78 U3.26@5038.22,3522.13 ; 5038.22,3583.25 cw(c5064.75,3583.25) v1@5045.99,3602.01
  Bottom Layer w10: v1(4476.44,3609.44) 4479,3612 5036,3612 v1(5037,3611) ; v1@4485.43,3600.45 cw(c4513.32,3572.56) 4513.32,3612 ; v1@4485.43,3618.43 ccw(c4500.96,3633.96) 4500.96,3612 ; 5003.89,3612 cw(c5003.89,3577.89) v1@5028.01,3602.01 ; 5008.71,3612 ccw(c5008.71,3639.29) v1@5028.01,3619.99
MII_CRS: RS5.4 U3.23 | length 1682.4
  Top Layer w10: RS5.4@3840.5,2968.75 3951.75,2968.75 v1(4321,3338) ; v1@4308.28,3338 cw(c4277.58,3338) 4299.29,3316.29 cw(c4321,3294.58) v1@4321,3325.28 ; v1(5028,3405) 5028,3413.85 5029,3414.85 U3.23@5106.13,3414.85 ; v1@5029.92,3403.08 cw(c5058.34,3374.66) 5058.34,3414.85 ; v1@5036.99,3396.01 cw(c5082.48,3350.52) U3.23@5082.48,3414.85
  Bottom Layer w10: v1(4321,3338) 4697,3338 4764,3405 v1(5028,3405) ; v1@4329.99,3329.01 cw(c4351.7,3307.3) 4351.7,3338 cw(c4351.7,3368.7) v1@4329.99,3346.99 ; v1@5019.01,3396.01 ccw(c4997.3,3374.3) 4997.3,3405 ccw(c4997.3,3435.7) v1@5019.01,3413.99
MII_INT: R5.2 U1.7 U3.3 | length 2314.2
  Top Layer w10: R5.2@3398.93,3374.43 cw(c3381.86,3357.36) 3406,3357.36 cw(c3430.14,3357.36) R5.2@3413.07,3374.43 ; R5.2@3406,3381.5 3406,3342 3469.16,3278.84 U1.7@3469.16,3248.32 3469.16,3201.84 v1(3515,3156) ; v1@3502.28,3156 ccw(c3471.58,3156) 3493.29,3177.71 ccw(c3515,3199.42) v1@3515,3168.72 ; v1@4965.01,3163.01 cw(c4945.71,3143.71) 4973,3143.71 ; 4973,3138.89 cw(c5007.11,3138.89) v1@4982.99,3163.01 ; v1@4973,3171 4973,3046 4997.85,3021.15 U3.3@5106.13,3021.15
  Bottom Layer w10: v1(3515,3156) 3744,3156 3855,3267 4879,3267 v1(4974,3172) ; v1@3523.99,3147.01 cw(c3545.7,3125.3) 3545.7,3156 cw(c3545.7,3186.7) v1@3523.99,3164.99 ; v1@4961.28,3172 ccw(c4930.58,3172) 4952.29,3193.71 ccw(c4974,3215.42) v1@4974,3184.72
MII_MDC: U1.31 U3.16 | length 2045.1
  Top Layer w8: U1.31@3488.84,2913.68 3488.84,2960.84 v1(3509,2981) ; v1(4856,3208) 4925.06,3277.06 U3.16@5106.13,3277.06 ; v1@4856,3221.72 ccw(c4856,3254.83) 4879.42,3231.42 ccw(c4902.83,3208) v1@4869.72,3208
  Bottom Layer w8: v1(3509,2981) 3577,2981 3690,2868 4515,2868 4855,3208 v1(4856,3208) ; v1@3518.7,2971.3 cw(c3542.11,2947.89) 3542.11,2981 cw(c3542.11,3014.11) v1@3518.7,2990.7 ; 4830.88,3183.88 cw(c4856,3158.75) v1@4856,3194.28 ; 4833.29,3186.29 ccw(c4811.58,3208) v1@4842.28,3208
MII_MDIO: R3.2 U1.30 U3.25 | length 2408.6
  Top Layer w10: R3.2@3397,2696.5 3469.16,2768.66 U1.30@3469.16,2913.68 v1(3469.16,3024.84) ; R3.2@3397,2706.5 ccw(c3397,2730.64) 3414.07,2713.57 ccw(c3431.14,2696.5) R3.2@3407,2696.5 ; v1@3460.17,3015.85 cw(c3438.46,2994.14) 3469.16,2994.14 cw(c3499.86,2994.14) v1@3478.15,3015.85 ; v1(4703,3211) 4704.5,3209.5 4707.5,3209.5 4952.22,3454.22 U3.25@5106.13,3454.22 ; v1@4703,3223.72 ccw(c4703,3268.9) 4734.95,3236.95 ; v1@4715.72,3211 cw(c4731.93,3211) 4720.47,3222.47
  Bottom Layer w10: v1(3469.16,3024.84) 4522.84,3024.84 4703,3205 v1(4703,3211) ; v1@3478.15,3015.85 cw(c3499.86,2994.14) 3499.86,3024.84 cw(c3499.86,3055.54) v1@3478.15,3033.83 ; 4677.05,3179.05 ccw(c4645.1,3211) v1@4690.28,3211 ; 4691.53,3193.53 cw(c4703,3182.07) v1@4703,3198.28
MII_RX_CLK/RMII_REF_CLK: RS5.8 U3.24 | length 1677.6
  Top Layer w10: RS5.8@3840.5,2905.76 v1(3919,2905.76) ; v1@3910.01,2896.76 ccw(c3888.3,2875.06) 3888.3,2905.76 ccw(c3888.3,2936.46) v1@3910.01,2914.75 ; v1(4771,3212) 4993.54,3434.54 U3.24@5106.13,3434.54 ; v1@4771,3224.72 ccw(c4771,3255.42) 4792.71,3233.71 ccw(c4814.42,3212) v1@4783.72,3212
  Bottom Layer w10: v1(3919,2905.76) 4464.76,2905.76 v1(4771,3212) ; v1@3927.99,2896.76 cw(c3949.7,2875.06) 3949.7,2905.76 cw(c3949.7,2936.46) v1@3927.99,2914.75 ; v1@4758.28,3212 cw(c4727.58,3212) 4749.29,3190.29 cw(c4771,3168.58) v1@4771,3199.28
MII_RX_DV/RMII_CRSDV: RS5.6 U3.55 | length 838.9
  Top Layer w10: RS5.6@3840.5,2937.25 3967.25,2937.25 4405.48,3375.48 U3.55@4497.87,3375.48
MII_RX_ER: RS5.2 U3.47 | length 1268.6
  Top Layer w10: RS5.2@3840.5,3000.24 3931.24,3000.24 4325,3394 v1(4325,3396) ; 4301.88,3370.88 ccw(c4276.75,3396) v1@4312.28,3396 ; 4306.71,3375.71 cw(c4325,3357.41) v1@4325,3383.28 ; v1@4618.01,3406.99 ccw(c4601.53,3423.47) 4624.83,3423.47 ; 4624.83,3433.93 ccw(c4662.93,3433.93) v1@4635.99,3406.99 ; U3.47@4624.83,3522.13 4624.83,3398.17 4625,3398 v1(4627,3398)
  Bottom Layer w10: v1(4325,3396) 4326,3397 4616,3397 v1@4622,3403 ; v1@4333.99,3387.01 cw(c4358.11,3362.89) 4358.11,3397 ; v1@4333.99,3404.99 ccw(c4353.29,3424.29) 4353.29,3397 ; 4593.89,3397 ccw(c4593.89,3431.11) v1@4618.01,3406.99 ; 4598.71,3397 cw(c4598.71,3369.71) v1@4618.01,3389.01
MII_RXD0: RS1.6 U3.56 | length 1304.5
  Top Layer w10: RS1.6@3840.5,3096.25 v5(3901.36,3096.25) ; v5@3893.76,3088.65 ccw(c3875.41,3070.3) 3875.41,3096.25 ccw(c3875.41,3122.2) v5@3893.76,3103.85 ; U3.56@4497.87,3355.8 4498.07,3356 4598,3356 4642,3312 v1(4642,3230) ; v1@4633.01,3238.99 ccw(c4611.3,3260.7) 4642,3260.7 ccw(c4672.7,3260.7) v1@4650.99,3238.99
  Bottom Layer w10: v5(3901.36,3096.25) 4551.25,3096.25 4642,3187 v1(4642,3230) ; v5@3908.96,3088.65 cw(c3927.31,3070.3) 3927.31,3096.25 cw(c3927.31,3122.2) v5@3908.96,3103.85 ; v1@4633.01,3221.01 cw(c4611.3,3199.3) 4642,3199.3 cw(c4672.7,3199.3) v1@4650.99,3221.01
MII_RXD1: RS1.4 U3.57 | length 1211.7
  Top Layer w10: RS1.4@3840.5,3127.75 v1(3946,3127.75) ; v1@3937.01,3118.76 ccw(c3915.3,3097.05) 3915.3,3127.75 ccw(c3915.3,3158.45) v1@3937.01,3136.74 ; U3.57@4497.87,3336.11 4497.98,3336 4571,3336 4602,3305 v1(4602,3191) ; v1@4593.01,3199.99 ccw(c4571.3,3221.7) 4602,3221.7 ccw(c4632.7,3221.7) v1@4610.99,3199.99
  Bottom Layer w10: v1(3946,3127.75) 3946.08,3127.83 3999,3127.83 3999.08,3127.75 4538.75,3127.75 v1(4602,3191) ; v1@3954.99,3118.76 cw(c3976.9,3096.84) 3976.9,3127.83 ; v1@3954.99,3136.74 ccw(c3976.5,3158.25) 3976.5,3127.83 ; v1@4589.28,3191 cw(c4558.58,3191) 4580.29,3169.29 cw(c4602,3147.58) v1@4602,3178.28
MII_RXD2: RS1.2 U3.58 | length 1103.6
  Top Layer w10: RS1.2@3840.5,3159.24 v1(3897,3159.24) ; v1@3888.01,3150.25 ccw(c3866.3,3128.54) 3866.3,3159.24 ccw(c3866.3,3189.94) v1@3888.01,3168.24 ; U3.58@4497.87,3316.43 4552.57,3316.43 4572,3297 4572,3230 v1(4571,3229) ; v1@4562.01,3237.99 ccw(c4537.89,3262.11) 4572,3262.11 ; 4572,3257.29 ccw(c4599.29,3257.29) v1@4579.99,3237.99
  Bottom Layer w10: v1(3897,3159.24) 4526.24,3159.24 4571,3204 ; v1@3905.99,3150.25 cw(c3927.7,3128.54) 3927.7,3159.24 cw(c3927.7,3189.94) v1@3905.99,3168.24 ; v1@4563.51,3218.72 cw(c4552.79,3204) 4571,3204 ; v1(4571,3229) 4571,3204 ; v1@4578.49,3218.72 ccw(c4589.21,3204) 4571,3204
MII_RXD3: RS3.1 U3.59 | length 1028.6
  Top Layer w10: RS3.1@3726.24,3435 4053,3435 v1(4134,3354) ; RS3.1@3728.28,3437.53 ccw(c3734.39,3443.65) 3734.39,3435 ; v1@4121.28,3354 ccw(c4090.58,3354) 4112.29,3375.71 ccw(c4134,3397.42) v1@4134,3366.72 ; v1@4375,3296 4375.74,3296.74 U3.59@4497.87,3296.74 ; v1@4382.99,3288.01 cw(c4404.07,3266.93) 4404.07,3296.74 ; v1@4382.99,3305.99 ccw(c4405.33,3328.33) 4405.33,3296.74
  Bottom Layer w10: v1@4134,3341.28 cw(c4134,3310.58) 4155.71,3332.29 cw(c4177.42,3354) v1@4146.72,3354 ; v1(4134,3354) 4192,3296 4373,3296 v1(4374,3297) ; 4340.89,3296 ccw(c4340.89,3330.11) v1@4365.01,3305.99 ; 4345.71,3296 cw(c4345.71,3268.71) v1@4365.01,3288.01
MII_TX_CLK: RS3.5 U3.18 | length 2227
  Top Layer w10: RS3.5@3663.25,3435.5 3663.25,3534.25 v1(3753,3624) ; v1@3740.28,3624 cw(c3709.58,3624) 3731.29,3602.29 cw(c3753,3580.58) v1@3753,3611.28 ; U3.18@5106.13,3316.43 5214.43,3316.43 v1(5237,3339) ; v1@5224.28,3339 cw(c5193.58,3339) 5215.29,3317.29 cw(c5237,3295.58) v1@5237,3326.28
  Bottom Layer w10: v1(3753,3624) 3754,3624 3774,3644 5099,3644 5237,3506 v1(5237,3339) ; v1@5228.01,3347.99 ccw(c5206.3,3369.7) 5237,3369.7 ccw(c5267.7,3369.7) v1@5245.99,3347.99
MII_TX_EN: RS3.7 U3.48 | length 1522.4
  Top Layer w10: RS3.7@3631.76,3435.5 3631.76,3552.76 3779,3700 v1(4504,3700) ; v1@4495.01,3691.01 ccw(c4473.3,3669.3) 4473.3,3700 ccw(c4473.3,3730.7) v1@4495.01,3708.99 ; v1@4596.16,3691.01 cw(c4574.45,3669.3) 4605.15,3669.3 cw(c4635.85,3669.3) v1@4614.14,3691.01 ; U3.48@4605.15,3522.13 v1(4605.15,3700)
  Bottom Layer w10: v1(4504,3700) v1(4605.15,3700) ; v1@4512.99,3691.01 cw(c4534.7,3669.3) 4534.7,3700 cw(c4534.7,3730.7) v1@4512.99,3708.99 ; v1@4596.16,3691.01 ccw(c4574.45,3669.3) 4574.45,3700 ccw(c4574.45,3730.7) v1@4596.16,3708.99
MII_TXD0: RS4.1 U3.51 | length 1200
  Top Layer w10: 3560.17,3475.17 cw(c3587,3448.34) v1@3587,3486.28 ; RS4.1@3560.24,3436.5 3560.24,3475.24 v1@3585.5,3500.5 ; 3567.41,3482.41 ccw(c3550.83,3499) v1@3574.28,3499 ; v1(4380,3452) 4382.22,3454.22 U3.51@4497.87,3454.22 ; v1@4388.99,3443.01 cw(c4416.06,3415.94) 4416.06,3454.22 ; v1@4388.99,3460.99 ccw(c4405.34,3477.34) 4405.34,3454.22
  Bottom Layer w10: v1(3587,3499) 4333,3499 v1(4380,3452) v1@4381,3451 ; v1@3595.99,3490.01 cw(c3617.7,3468.3) 3617.7,3499 cw(c3617.7,3529.7) v1@3595.99,3507.99 ; v1@4367.28,3452 ccw(c4336.58,3452) 4358.29,3473.71 ccw(c4380,3495.42) v1@4380,3464.72